# EAGLE board Leonardo (EAGLE 6.5.0)
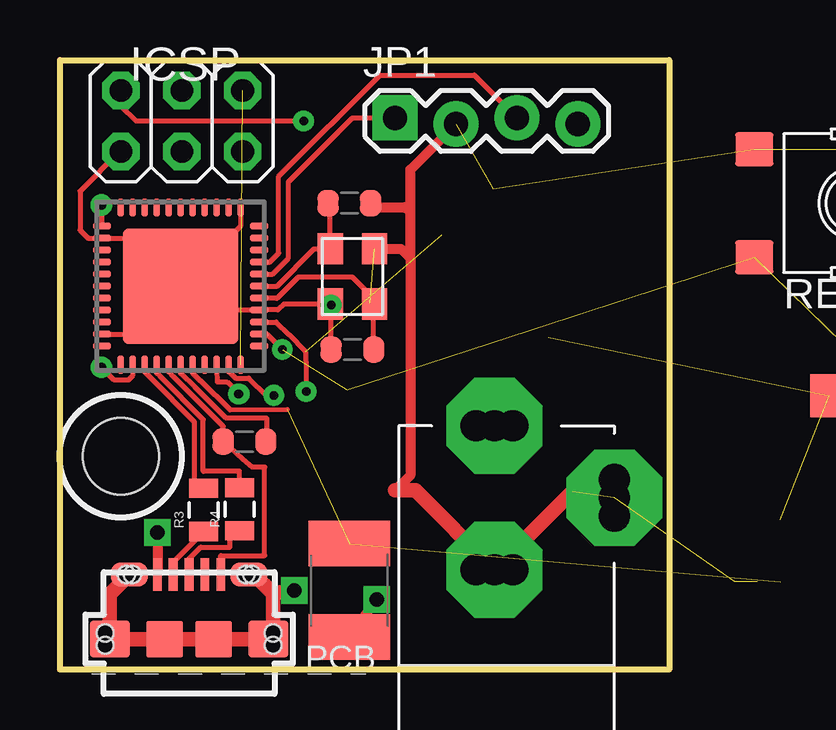
[diagram p0: board, top side]
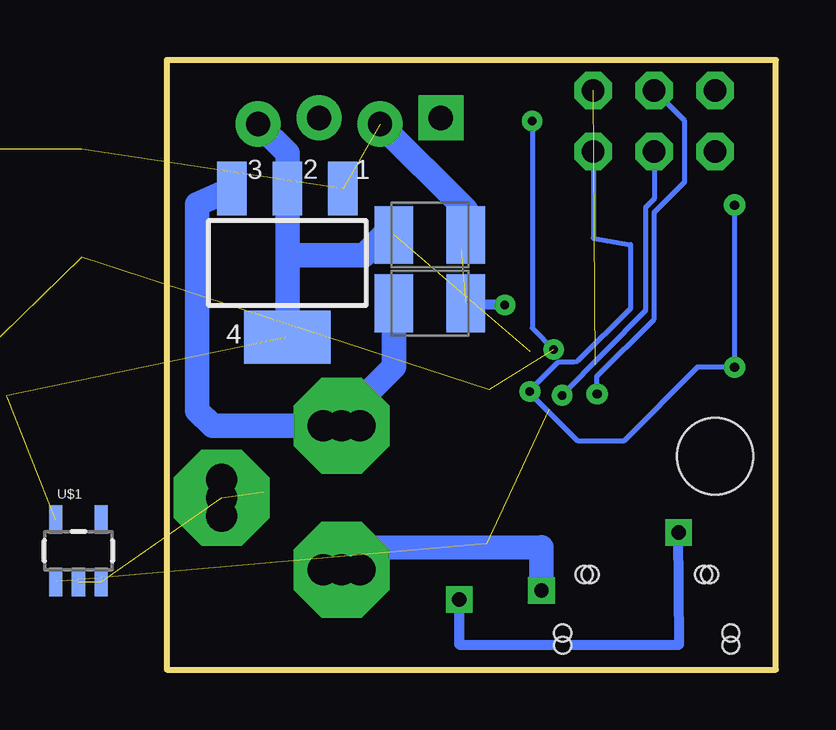
[diagram p1: board, bottom side, seen from below]

Size 25.4 x 25.4 mm. Coordinates in mm from the lower left corner, seen from the top.
Outline: 0,0 0,25.4 25.4,25.4 25.4,0 0,0
Copper layers (1*16): Top 0.035mm / dielectric 1.5mm / Bottom 0.035mm
Design rules "default": minimum track width 10mil, minimum drill 22mil, track to track 10mil, track to pad 10mil, pad to pad 8mil, via to via 12mil, smd to smd 8mil, copper to edge 24mil, drill to drill 12mil, minimum pad ring 10mil, minimum via ring 10mil, stop-mask expansion 2mil, vias tented up to drill 30mil, thermal gap 10mil
Net classes: 0 default: width 0.254 mm, drill 0.61 mm, clearance 0.254 mm; 1 power: width 0.254 mm, drill 0.61 mm, clearance 0.254 mm; 2 gnd: width 0.254 mm, drill 0.61 mm, clearance 0.254 mm; 3 usbvcc: width 0.254 mm, drill 0.61 mm, clearance 0.254 mm; 4 aref: width 0.254 mm, drill 0.61 mm, clearance 0.254 mm
Holes 3.17 mm at 2.54,8.89

## Footprints (pad centres in the part's own frame; a part is rotated, then mirrored left to right if it is on the bottom)
C0603-ROUND = smd 0.898 x 1.1: 1 -0.889,0; 2 0.889,0
SMC_B = smd 1.6 x 2.4: + -1.5,0; - 1.5,0
POWERSUPPLY_DC-21MM = drill 1.3 pad 4 octagon: 1 -5.08,-3.353; 2 -0.076,-6.35; 3 -0.076,-0.356 | drill 1.3: 4 -5.08,-4.115; 5 -5.08,-2.591; 6 -0.838,-0.356; 7 0.686,-0.356; 8 -0.838,-6.35; 9 0.686,-6.35
L1812 = smd 1.9 x 3.4: 1 -1.95,0; 2 1.95,0
SOT223 = smd 1.219 x 2.235: 1 -2.311,-3.099; 2 0,-3.099; 3 2.311,-3.099 | smd 3.6 x 2.2: 4 0,3.099
2X03 = drill 0.95 pad 1.55 octagon: 1 -2.54,-1.27; 2 -2.54,1.27; 3 0,-1.27; 4 0,1.27; 5 2.54,-1.27; 6 2.54,1.27
CON2_USB_MICRO_B_AT = smd 0.406 x 1.346: P1 -1.321,2.692; P2 -0.66,2.692; P3 0,2.692; P4 0.66,2.692; P5 1.321,2.692 | smd 1.651 x 1.549: S1 -3.302,0; S2 3.302,0 | smd 1.524 x 1.016: S3 -2.489,2.692; S4 2.489,2.692 | smd 1.524 x 1.524: S5 -1.016,0; S6 1.016,0 | hole 0.7: -3.505,0.254; -3.505,-0.254; 3.505,0.254; 3.505,-0.254; -2.616,2.692; -2.362,2.692; 2.362,2.692; 2.616,2.692
1X04_LOCK = drill 1.016 pad 1.88 square: 1 0,0.127 | drill 1.016 pad 1.88: 2 2.54,-0.127; 3 5.08,0.127; 4 7.62,-0.127
1206 = smd 1.6 x 1.8: 1 -1.4,0; 2 1.4,0
0805 = smd 0.8 x 1.2: 1 -0.9,0; 2 0.9,0
TS42 = smd 1.6 x 1.4: 1 -4.2,2.25; 2 4.2,2.25; 3 -4.2,-2.25; 4 4.2,-2.25; 5 -4.2,0
QFN44ML7X7 = smd 0.75 x 0.275: 1 -3.275,2.5; 2 -3.275,2; 3 -3.275,1.5; 4 -3.275,1; 5 -3.275,0.5; 6 -3.275,0; 7 -3.275,-0.5; 8 -3.275,-1; 9 -3.275,-1.5; 10 -3.275,-2; 11 -3.275,-2.5; 23 3.275,-2.5; 24 3.275,-2; 25 3.275,-1.5; 26 3.275,-1; 27 3.275,-0.5; 28 3.275,0; 29 3.275,0.5; 30 3.275,1; 31 3.275,1.5; 32 3.275,2; 33 3.275,2.5 | smd 0.275 x 0.75: 12 -2.5,-3.275; 13 -2,-3.275; 14 -1.5,-3.275; 15 -1,-3.275; 16 -0.5,-3.275; 17 0,-3.275; 18 0.5,-3.275; 19 1,-3.275; 20 1.5,-3.275; 21 2,-3.275; 22 2.5,-3.275; 34 2.5,3.275; 35 2,3.275; 36 1.5,3.275; 37 1,3.275; 38 0.5,3.275; 39 0,3.275; 40 -0.5,3.275; 41 -1,3.275; 42 -1.5,3.275; 43 -2,3.275; 44 -2.5,3.275 | smd 4.826 x 4.826: EXP 0,0
SOT23-5 = smd 0.55 x 1.2: 1 -0.95,-1.3; 2 0,-1.3; 3 0.95,-1.3; 4 0.95,1.3; 5 -0.95,1.3
SPARKFUN-DIGITALIC_TQFP44 = smd 1.5 x 0.5: 1 -5.8,4; 2 -5.8,3.2; 3 -5.8,2.4; 4 -5.8,1.6; 5 -5.8,0.8; 6 -5.8,0; 7 -5.8,-0.8; 8 -5.8,-1.6; 9 -5.8,-2.4; 10 -5.8,-3.2; 11 -5.8,-4; 23 5.8,-4; 24 5.8,-3.2; 25 5.8,-2.4; 26 5.8,-1.6; 27 5.8,-0.8; 28 5.8,0; 29 5.8,0.8; 30 5.8,1.6; 31 5.8,2.4; 32 5.8,3.2; 33 5.8,4 | smd 0.5 x 1.5: 12 -4,-5.8; 13 -3.2,-5.8; 14 -2.4,-5.8; 15 -1.6,-5.8; 16 -0.8,-5.8; 17 0,-5.8; 18 0.8,-5.8; 19 1.6,-5.8; 20 2.4,-5.8; 21 3.2,-5.8; 22 4,-5.8; 34 4,5.8; 35 3.2,5.8; 36 2.4,5.8; 37 1.6,5.8; 38 0.8,5.8; 39 0,5.8; 40 -0.8,5.8; 41 -1.6,5.8; 42 -2.4,5.8; 43 -3.2,5.8; 44 -4,5.8
CRYSTAL-3.2-2.5 = smd 1.3 x 1.05: 1 -1.15,-0.925; 2 1.15,-0.925; 3 1.15,0.925; 4 -1.15,0.925

## Placement (x,y rotation side)
C3  22p  [C0603-ROUND]  12.19,13.34 0 top
C4  22p  [C0603-ROUND]  12.06,19.43 0 top
C7  1uF  [C0603-ROUND]  7.7,9.5 180 top
C10  10u  [SMC_B]  14.43,15.27 0 bottom
C12  10u  [SMC_B]  14.43,18.11 0 bottom
EXTPOWER  POWERSUPPLY_DC21MMX  [POWERSUPPLY_DC-21MM]  18.03,3.81 180 top
F1  MF-MSMF050-2 500mA  [L1812]  12.06,3.3 270 top
IC1  NCP1117ST50T3G  [SOT223]  20.37,16.94 180 bottom
ICSP  ICSP  [2X03]  5.08,22.86 180 top
J1  USB MICRO  [CON2_USB_MICRO_B_AT]  5.38,1.27 0 top
JP1  [1X04_LOCK]  13.97,22.86 0 top
R2  10k  [1206]  33.48,11.4 180 top  (outside the outline)
R3  22  [0805]  5.99,6.65 90 top
R4  22  [0805]  7.49,6.68 90 top
RESET  TS42  [TS42]  33.15,19.43 180 top  (outside the outline)
U1  ATMEGA32U4-XUMU  [QFN44ML7X7]  5.03,15.98 90 top
U$1  LTC4411  [SOT23-5]  29.08,4.95 0 bottom
U$2  ATMEGA32U4TQFP  [SPARKFUN-DIGITALIC_TQFP44]  53.34,10.79 0 top  (outside the outline)
Y1  16MHz KX-7  [CRYSTAL-3.2-2.5]  12.19,16.38 270 top

## Library data of the parts
C3 C4 C7 EXTPOWER ICSP J1 RESET U1 Y1 = SmartPrj
C10 C12 F1 = rcl
IC1 = linear
JP1 = SparkFun-Connectors
R2-R4 = SparkFun-Passives
U$1 = IntegerLabs
U$2 = SparkFun-DigitalIC; PROD_ID: IC-11161

## Nets
5-GND: RESET.5
+5V [usbvcc]: C12.+ IC1.2 IC1.4 ICSP.2 JP1.4 R2.2 U1.2 U1.14 U1.34 U$1.5
AREF [aref]: U1.42
AVCC: U1.24
AVCC1: U1.44
D+: J1.P3 R4.1
D-: J1.P2 R3.1
GND [gnd]: C3.1 C4.2 C10.- C12.- EXTPOWER.1 EXTPOWER.3 IC1.1 ICSP.6 J1.S1 J1.S2 J1.S3 J1.S4 J1.S5 J1.S6 JP1.2 RESET.3 RESET.4 U1.15 U1.23 U1.35 U1.43 U1.EXP U$1.2 U$1.3 Y1.2 Y1.4
MISO: ICSP.1 U1.11
MOSI: ICSP.4 U1.10
RD+: R4.2 U1.4
RD-: R3.2 U1.3
RESET: ICSP.5 R2.1 RESET.1 RESET.2 U1.13
SCK: ICSP.3 U1.9
SCL: JP1.1 U1.18
SDA: JP1.3 U1.19
UCAP: C7.1 U1.6
UGND [gnd]: C7.2 J1.P5 U1.5
USBID: J1.P4
VIN [power]: C10.+ EXTPOWER.2 IC1.3
VUSB: F1.1 U1.7 U$1.1
XTAL1: C4.1 U1.17 Y1.1
XTAL2: C3.2 U1.16 Y1.3
XUSB [usbvcc]: F1.2 J1.P1

## Tracks (layer width: path | path; a pad name or v marks a point on that pad's centre or on a via)
+5V  (via drill 0.36, 0.38)  (3 unrouted)
  Top 0.203: U1.2 3.03,12.25 2.85,12.06 2.26,12.06 v1.73,12.6 | U1.34 1.75,19.33 v1.73,19.36 | U1.14 9.02,14.48 9.53,13.97 10.24,13.23 10.29,11.61 v10.26,11.58
  Bottom 0.203: ICSP.2 7.62,17.98 6.07,17.7 6.07,15.04 8.28,12.85 8.43,12.83 9.07,12.83 10.31,11.58 | v1.73,19.36 v1.73,12.6 3.28,12.6 6.35,9.53 8.26,9.53 10.31,11.58 | 10.31,11.58 v10.26,11.58
  Bottom 1.016: JP1.4 20.37,21.51 IC1.2 20.37,17.27 | IC1.4 20.37,17.27 | C12.+ 16.33,18.11 17.17,17.27 20.37,17.27
D+
  Top 0.203: J1.P3 5.38,4.62 5.87,5.11 7.09,5.11 7.09,5.59 R4.1
D-
  Top 0.203: J1.P2 4.72,4.47 5.64,5.38 6,5.74 R3.1
GND  (via drill 0.36, 0.6)  (7 unrouted)
  Top 0.203: U1.43 3.03,13.98 U1.EXP | U1.EXP 6.25,15.98 | 6.25,15.98 7.24,14.99 U1.15 8.31,14.99 9.09,14.99 9.34,15.23 Y1.2 v11.3,15.2 C3.1 | U1.EXP 4.88,15.98 2.9,17.96 1.77,17.96 U1.35 1.17,17.98 0.84,18.31 0.84,19.94 2.49,21.59 ICSP.6 | U1.23 7.53,18.48 6.45,17.4 6.45,16.18 6.25,15.98
  Top 0.406: 14.61,17.14 14.61,8.1 13.97,7.46 | C4.2 13.12,19.27 14.39,19.27 14.61,19.05 | Y1.4 14.22,17.53 14.61,17.14 | 14.61,17.14 14.61,19.05 | 14.61,19.05 14.61,20.83 JP1.2
  Top 0.61: 21.36,7.42 EXTPOWER.3 14.81,7.46 13.97,7.46 | J1.S4 8.1,3.96 | 8.1,3.96 8.89,3.17 8.89,1.47 | J1.S2 J1.S6 J1.S5 J1.S1 2.08,3.15 J1.S3 | 8.1,3.96 8.87,3.17 v9.78,3.3
  Top 1.016: 8.89,1.47 J1.S2
  Bottom 0.406: v11.3,15.2 12.86,15.2 C10.-
  Bottom 1.016: v9.78,3.3 9.78,5.11 17.12,5.08 EXTPOWER.3 | C12.- 12.93,19.15 JP1.2
MISO  (1 unrouted)
MOSI  (via drill 0.36)
  Top 0.203: U1.10 7.03,12.43 7.32,12.14 7.87,12.14 8.59,11.43 8.87,11.43 8.76,11.4 v8.91,11.43
  Bottom 0.203: ICSP.4 5.08,19.61 5.44,19.25 5.44,14.96 v8.91,11.43
N$1  (via drill 0.36)
  other vias: 7.44,11.48
RD+
  Top 0.203: R4.2 7.48,8.27 5.97,8.26 5.97,10.41 4.19,12.19 4.01,12.36 U1.4
RD-
  Top 0.203: R3.2 5.6,7.55 5.61,7.9 5.61,10.31 3.79,12.17 3.53,12.42 U1.3
RESET  (via drill 0.36)  (4 unrouted)
  Top 0.203: U1.13 8.63,13.98 v9.27,13.34 | ICSP.5 2.54,23.5 3.17,22.86 v10.16,22.86
  Bottom 0.203: v10.16,22.86 10.16,14.22 v9.27,13.34
SCK  (via drill 0.36)
  Top 0.203: U1.9 6.53,12.49 6.55,11.99 6.96,11.99 v7.47,11.48
  Bottom 0.203: v7.47,11.48 7.47,12.22 5.08,14.61 5.08,19.05 3.81,20.32 3.81,22.86 ICSP.3
SCL
  Top 0.203: U1.18 8.86,16.48 9.53,17.14 9.53,20.32 12.19,22.99 JP1.1
SDA
  Top 0.203: U1.19 8.75,16.98 9.12,17.35 9.12,20.55 13.34,24.77 17.27,24.77 JP1.3
UCAP
  Top 0.203: C7.1 8.61,10.49 6.91,10.49 5.64,11.76 5.03,12.34 U1.6
UGND
  Top 0.203: J1.P5 6.71,4.75 8.53,4.75 8.53,8.43 8,8.43 7.62,8.76 6.83,9.5 C7.2 6.81,10.13 4.75,12.19 4.55,12.4 U1.5
VIN
  Bottom 1.016: IC1.3 24.13,19.38 24.13,10.79 23.5,10.16 EXTPOWER.2 18.11,10.44 15.93,12.62 C10.+
VUSB  (2 unrouted)
  Top 0.203: 9.47,10.85 7.09,10.82 5.84,12.06 5.82,12.06 5.53,12.35 U1.7
XTAL1
  Top 0.203: U1.17 9.04,15.98 10.59,17.53 Y1.1 11.27,19.34 C4.1
XTAL2
  Top 0.203: C3.2 13.08,15.2 Y1.3 13.12,15.43 12.19,16.36 9.93,16.36 9.04,15.47 8.31,15.47 U1.16
XUSB  (via drill 0.6)
  Top 0.406: F1.2 v13.21,2.92 | v4.06,5.71 J1.P1
  Bottom 0.406: v13.21,2.92 13.21,1.04 4.04,1.04 v4.06,5.71